# Altium PCB PCB1.PcbDoc
Units mm, origin at the board's own origin, x right, y up, seen from the top; angles counter-clockwise.
Board outline 104.78 x 92.08 mm, 2 copper layers (Top Layer, Bottom Layer); 18 components, 11 nets, 107 pads, 0 vias.
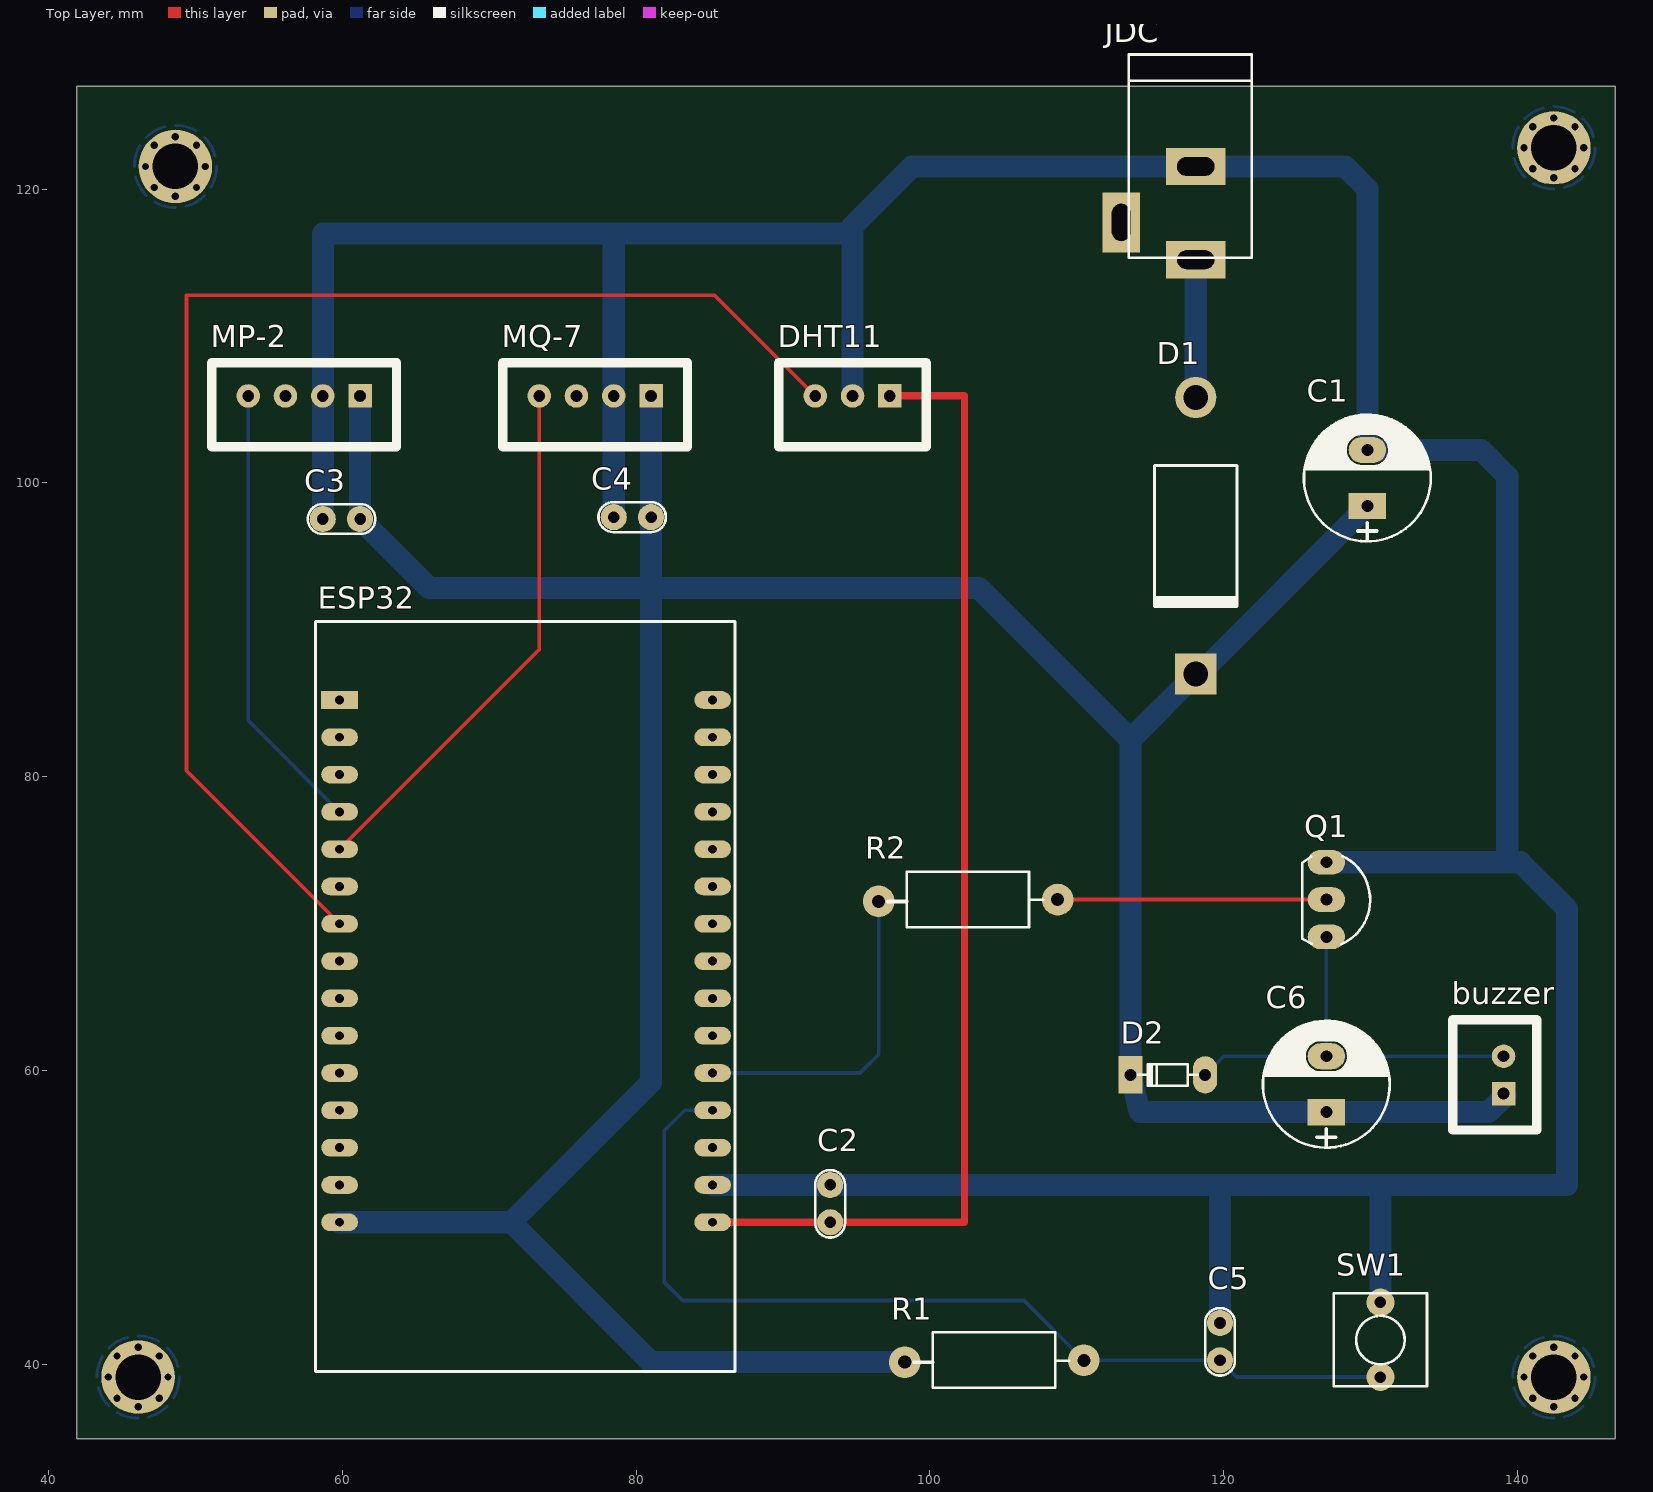
[diagram p0: Top Layer view]
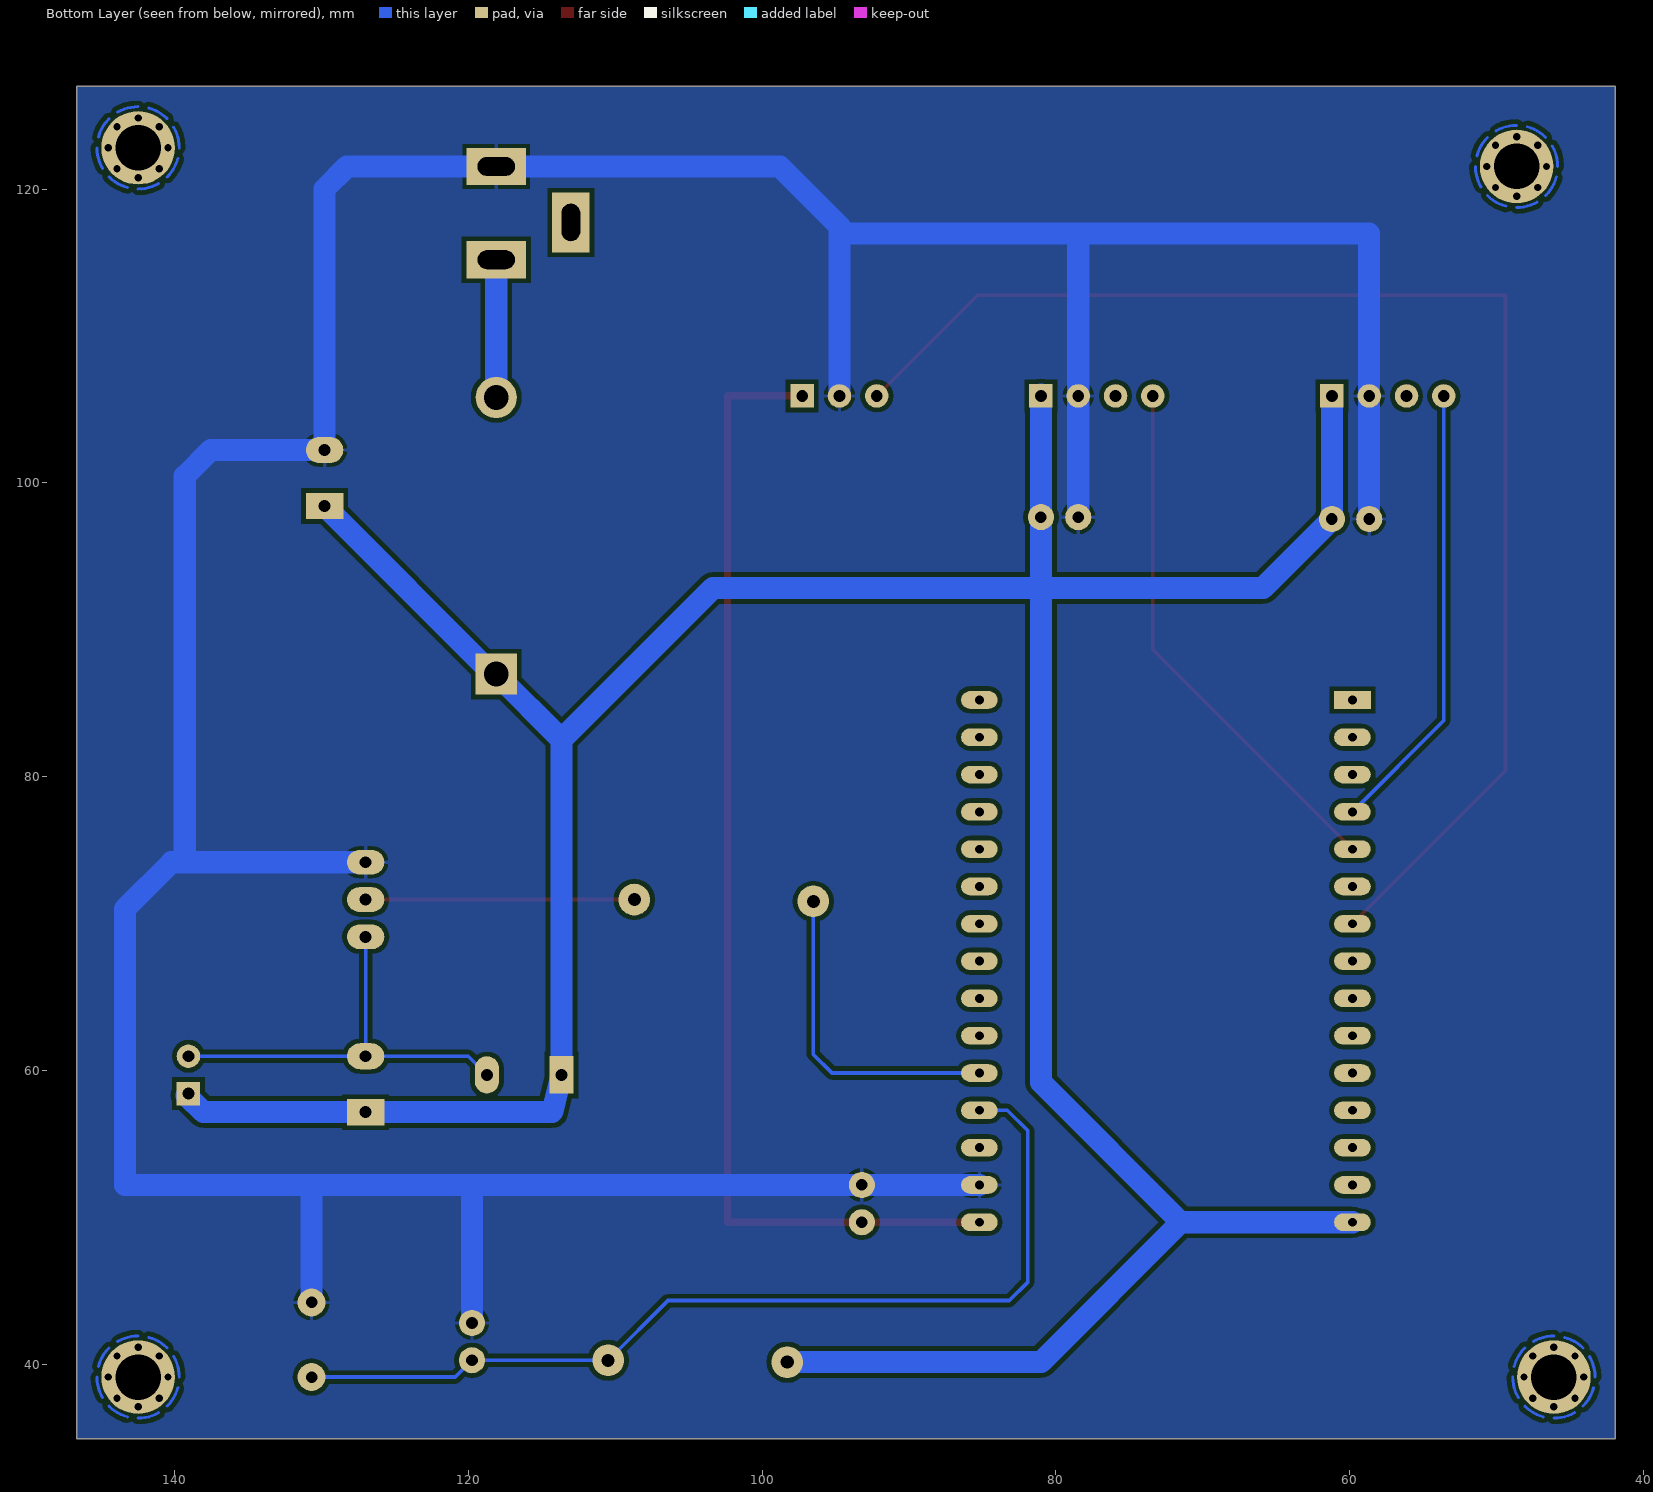
[diagram p1: Bottom Layer view, seen from below]
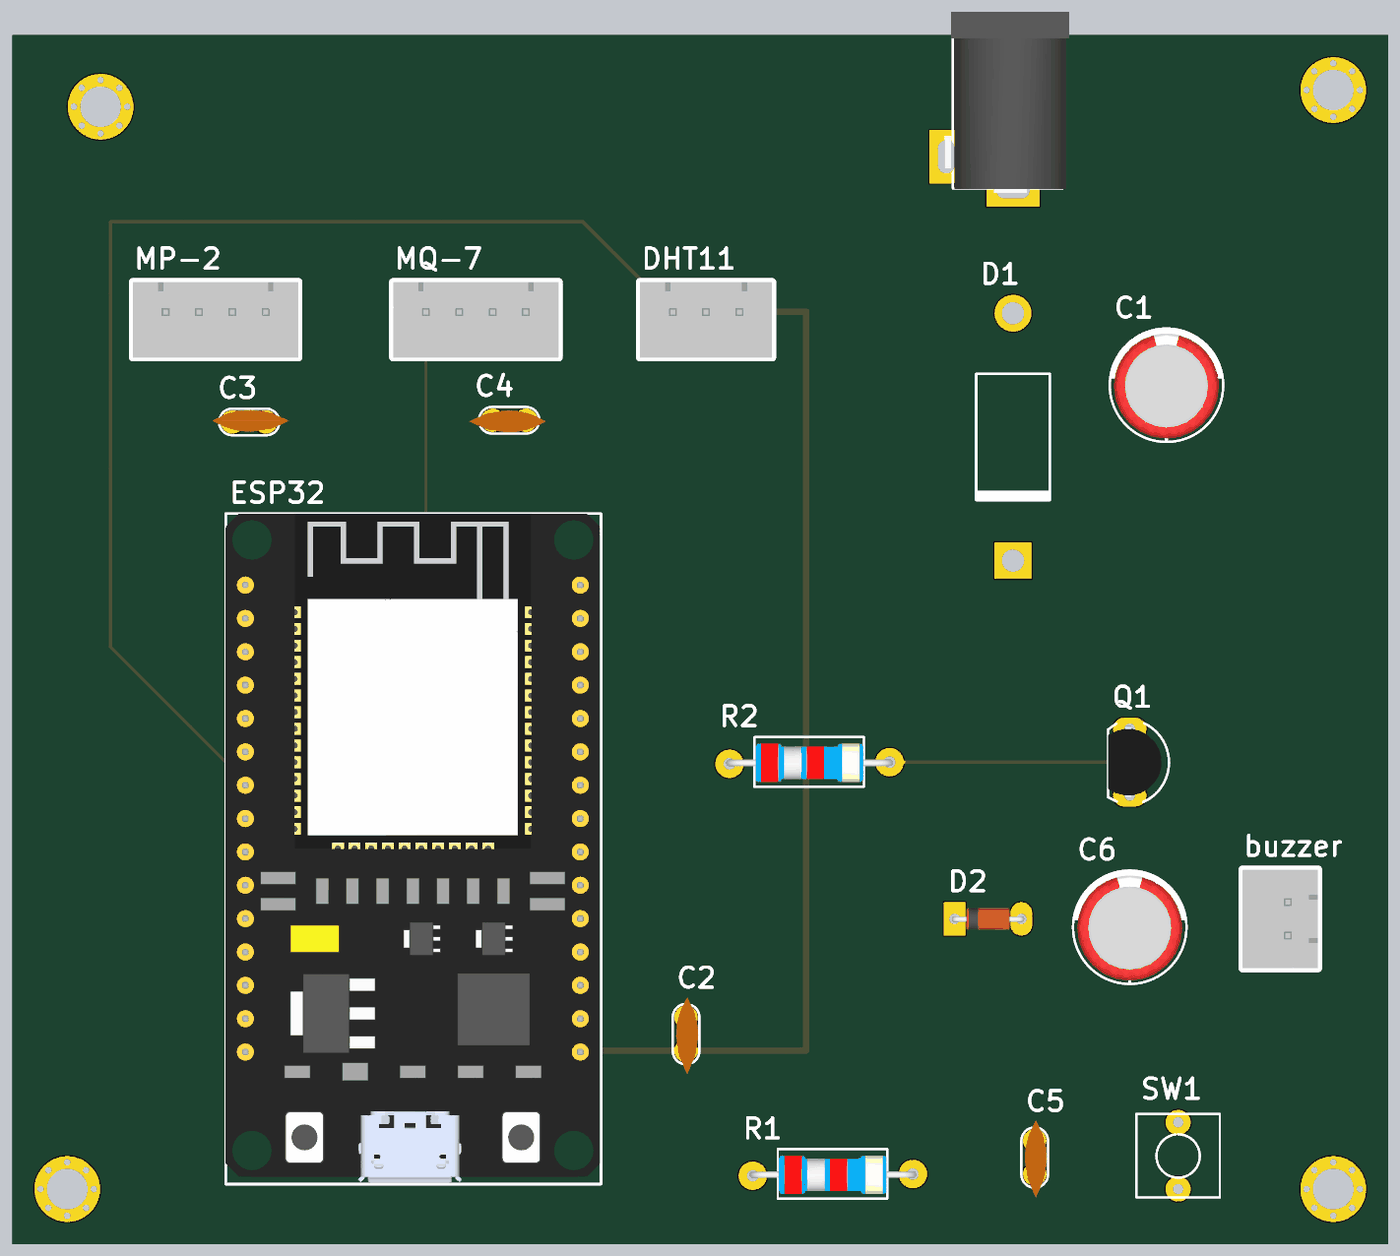
[diagram p2: 3D render of the assembled board from above, using the file's embedded part models]

## Layer stack, top to bottom
Top Solder: solder mask 0.0102, Solder Resist, Dk 3.5
Top Layer: signal copper 0.0356
Dielectric 1: dielectric 0.32, FR-4, Dk 4.8
Bottom Layer: signal copper 0.0356
Bottom Solder: solder mask 0.0102, Solder Resist, Dk 3.5

## Board outline
41.91,34.925 146.685,34.925 146.685,127 41.91,127

## Design rules (kind name [scope] priority, off if disabled: settings)
Clearance [All] p1: gap=0.31
PolygonConnect [All] p1: connectstyle=Relief reliefconductorwidth=0.254 reliefentries=4 polygonreliefangle="90 Angle" airgapwidth=0.254
RoutingLayers [All] p1: top layer_v5=FALSE bottom layer_v5=TRUE
RoutingVias [All] p1: holewidth=0.711 width=1.27 viastyle="Through Hole" minholewidth=0.711 minwidth=1.27 maxholewidth=0.711 maxwidth=1.27
SolderMaskExpansion [All] p1: expansion=0.102
Width 3V [InNet('3.3V')] p1: maxlimit=0.7 minlimit=0.3 preferedwidth=0.5
Width GND [InNet('GND')] p2: maxlimit=1.7 minlimit=1.3 preferedwidth=1.5
Width 5V [InNet('5V')] p3: maxlimit=1.7 minlimit=1.3 preferedwidth=1.5
Width [All] p4: maxlimit=0.254 minlimit=0.254 preferedwidth=0.254
29 further rules are at their usual default settings.

## Components (designator, comment, footprint, x,y, rotation, side; value= is the part's Value field where it differs from the comment)
buzzer "buzzer" XH2.54M-2 139.065,58.42 r90 top
C1 "1000uF/16V" CP1.5/3.4 129.794,98.425 r90 top
C2 "100pF" CN1 93.218,52.197 r270 top
C3 "100nF" CN1 58.674,97.536 r0 top
C4 "100nF" CN1 81.026,97.663 r180 top
C5 "100nF" CN1 119.761,42.799 r270 top
C6 "100uF/35V" CP1.5/3.4 127,57.15 r90 top
D1 "Diode 1N5408" DO-201AD 118.11,96.393 r270 top
D2 "100v" "DIODE 0.5A" 116.205,59.69 r0 top
DHT11 "DHT11" XH2.54M-3 97.282,105.918 r180 top
ESP32 "ESP32 DEVKIT" "ESP32 WROOM 32 KIT" 59.817,85.217 r0 top
JDC "Jac DC" DC-IN 115.57,118.364 r270 top
MP-2 "MP-2" XH2.54M-4 61.214,105.918 r180 top
MQ-7 "MQ-7" XH2.54M-4 81.026,105.918 r180 top
Q1 "2N222" TO92-123 127,71.628 r270 top
R1 "1K" RES-1/2W 103.886,40.259 r0 top
R2 "1K" RES-1/2W 102.108,71.628 r0 top
SW1 "SW" SW2 130.683,39.116 r90 top

## Footprints (in the part's own frame and the unit in brackets; to place one, negate y for a bottom-side part, rotate by r counter-clockwise, add the part's x,y. Pads: shape width x height; smd on the part's side, far side on the other; paste and mask are expansions set on the pad)
CN1 [mil]
  round 70 hole 31: 1(0,0) 2(100,0)
  silkscreen extent -40,-40 141,40, body extent -60,-30 170,37, height 265
CP1.5/3.4 [mil] "Tu hoa 220->470uF,16V, 470uF/16V,25V"
  rect 70x100 hole 32: 1(0,0)
  oval 70x100 hole 32: 2(150,0)
  silkscreen extent -95,-170 245,170, body extent -85,-157 230,157, height 446
DC-IN [mil] "Jac DC input"
  rect 100x160 hole 50 slot 100 at 90 deg: 1(125,100) 2(-125,100)
  rect 160x100 hole 50 slot 100 at 0 deg: 3(25,-100)
  silkscreen extent -425,-80 120,250, body extent -410,-105 134,269, height 434
"DIODE 0.5A" [mil] "Diode muoi, xung"
  oval 65x100 hole 32: 1(100,0)
  rect 65x100 hole 32: 2(-100,0)
  silkscreen extent -80,-30 80,28, body extent -108,-33 108,32, height 61
DO-201AD [mm] "Diode, Axial; Body 9.5 x 5.6 mm (LxDia. max), Lead Dia. 1.32 mm (max)"
  round 2.8 hole 1.7: 1(-9.42,0)
  rect 2.8x2.8 hole 1.7: 2(9.42,0)
  silkscreen extent -4.8,-2.8 4.9,2.8
"ESP32 WROOM 32 KIT" [mm]
  rect 2.5x1.2 hole 0.6: 1(0,0)
  oval 2.5x1.2 hole 0.6: 2(0,-2.54) 3(0,-5.08) 4(0,-7.62) 5(0,-10.16) 6(0,-12.7) 7(0,-15.24) 8(0,-17.78) 9(0,-20.32) 10(0,-22.86) 11(0,-25.4) 12(0,-27.94) 13(0,-30.48) 14(0,-33.02) 15(0,-35.56) 16(25.4,-35.56) 17(25.4,-33.02) 18(25.4,-30.48) 19(25.4,-27.94) 20(25.4,-25.4) 21(25.4,-22.86) 22(25.4,-20.32) 23(25.4,-17.78) 24(25.4,-15.24) 25(25.4,-12.7) 26(25.4,-10.16) 27(25.4,-7.62) 28(25.4,-5.08) 29(25.4,-2.54) 30(25.4,0)
  silkscreen extent -1.65,-45.72 26.92,5.33, body extent -1.65,-45.6 26.85,5.33, height 10.49
RES-1/2W [mil]
  round 85 hole 35: 1(-220,-5) 2(260,0)
  silkscreen extent -195,-74 221,75, body extent -230,-60 270,56, height 121
SW2 [mil] "SW button 2pin, 250x 250 mil"
  round 75 hole 31: 1(0,0) 2(200,0)
  silkscreen extent -25,-125 225,125
TO92-123 [mil] "TO-92"
  oval 66x100 hole 32: 1(-100,0) 2(0,0) 3(100,0)
  silkscreen extent -117,-65 120,118, body extent -109,-66 109,95, height 245
XH2.54M-2 [mm]
  rect 1.6x1.6 hole 0.8: 1(0,0)
  round 1.6 hole 0.8: 2(2.54,0)
  silkscreen extent -2.48,-2.26 5.02,3.46, body extent -2.48,-2.26 5.02,3.48, height 6.91
XH2.54M-3 [mm]
  rect 1.6x1.6 hole 0.8: 1(0,0)
  round 1.6 hole 0.8: 2(2.54,0) 3(5.08,0)
  silkscreen extent -2.48,-2.26 7.56,3.46, body extent -2.48,-2.26 7.56,3.48, height 6.91
XH2.54M-4 [mm]
  rect 1.6x1.6 hole 0.8: 1(0,0)
  round 1.6 hole 0.8: 2(2.54,0) 3(5.08,0) 4(7.62,0)
  silkscreen extent -2.48,-2.26 10.1,3.46, body extent -2.48,-2.26 10.1,3.48, height 6.91

## Part data
buzzer: library part "Header 2P 2.54 Duc Thang", "C?m"
C1: library part CP4, "Cap 1000uF/16V - 220uF/50V"
C2 C3 C4 C5: library part CN1, "Cap np  1pF - 472pF"
C6: library part CP3, "Cap 100uF/35V - 470uF/16V"
D1: "3 Amp Medium Power Silicon Rectifier Diode"
D2: library part "Diode 1N4148", "C?m"
DHT11: library part "Header 3P 2.54 Duc Thang", "C?m"
ESP32: library part "ESP32 WROOM 32 KIT"
JDC: library part DCIN, "Jac DC input"
MP-2 MQ-7: library part "Header 4P 2.54 Duc Thang", "C?m"
Q1: "NPN 600mW, ECB"
R1 R2: library part Res, "Res"
SW1: library part SW2, "Switch button 2 pin"

## Free pads (board coordinates)
  round 0.5 hole 0.5: 2(46.101,41.148) 2(48.641,123.571) 2(142.494,41.148) 2(142.494,124.841) 3(44.664,40.553) 3(47.204,122.976) 3(141.057,40.553) 3(141.057,124.246) 4(44.069,39.116) 4(46.609,121.539) 4(140.462,39.116) 4(140.462,122.809) 5(44.664,37.679) 5(47.204,120.102) 5(141.057,37.679) 5(141.057,121.372) 6(46.101,37.084) 6(48.641,119.507) 6(142.494,37.084) 6(142.494,120.777) 7(47.538,37.679) 7(50.078,120.102) 7(143.931,37.679) 7(143.931,121.372) 8(48.133,39.116) 8(50.673,121.539) 8(144.526,39.116) 8(144.526,122.809) 9(47.538,40.553) 9(50.078,122.976) 9(143.931,40.553) 9(143.931,124.246)
  round 5 hole 3.1: 3(46.101,39.116) 3(48.641,121.539) 3(142.494,39.116) 3(142.494,122.809)

## Nets (pads, with @x,y where several pads share a name; then routed paths per layer and width w, separated by ;. In a path a pad name is that pad's centre, name@x,y a point inside that pad or via, vN(x,y) a via of type N, cw(c..) or ccw(c..) an arc to the next point about the centre after c; other vN are vias at no path point)
3.3V: C2.2 DHT11.1 ESP32.16 | length 79.4
  Top Layer w0.5: ESP32.16 C2.2 ; C2.2@92.329,49.657 C2.2 ; DHT11.1 102.362,105.918 102.362,49.657 C2.2
5V: buzzer.1 C1.1 C3.2 C4.1 C6.1 D1.2 D2.2 ESP32.15 MP-2.1 MQ-7.1 R1.1 | length 243.3
  Bottom Layer w1.5: ESP32.15 71.501,49.657 ; MP-2.1 C3.2 65.913,92.837 81.026,92.837 ; MQ-7.1@81.026,106.008 MQ-7.1 C4.1 81.026,92.837 ; R1.1 81.026,40.132 71.501,49.657 ; C1.1 118.342,86.973 D1.2 113.665,82.528 ; buzzer.1@139.192,58.293 138.049,57.15 C6.1 114.3,57.15 D2.2 113.665,82.528 ; 71.501,49.657 81.026,59.182 81.026,92.837 ; 81.026,92.837 103.356,92.837 113.665,82.528
BUZZER: ESP32.20 R2.1 | length 22.2
  Bottom Layer w0.254: ESP32.20 95.25,59.817 96.52,61.087 R2.1
DHT11: DHT11.3 ESP32.7 | length 92.8
  Top Layer w0.254: ESP32.7 49.403,80.391 49.403,112.776 85.344,112.776 DHT11.3
GND: C1.2 C2.1 C3.1 C4.2 C5.1 DHT11.2 ESP32.17 JDC.2 MP-2.2 MQ-7.2 Q1.1 SW1.2 | length 288.7
  Bottom Layer w1.5: C3.1 MP-2.2 58.674,116.967 78.486,116.967 ; C4.2 MQ-7.2 78.486,116.967 ; ESP32.17 C2.1 119.761,52.197 ; 94.234,116.967 78.486,116.967 ; DHT11.2 94.742,117.475 98.806,121.539 JDC.2 128.27,121.539 129.794,120.015 C1.2 137.541,102.235 139.319,100.457 139.319,75.057 ; C5.1 119.761,52.197 ; Q1.1 140.208,74.168 143.383,70.993 143.383,52.197 130.683,52.197 ; SW1.2 130.683,52.197 ; 119.761,52.197 130.683,52.197
MP-2: ESP32.4 MP-2.4 | length 30.9
  Bottom Layer w0.254: MP-2.4 53.594,83.82 ESP32.4
MQ-7: ESP32.5 MQ-7.4 | length 36.5
  Top Layer w0.254: ESP32.5 73.406,88.646 MQ-7.4
Netbuzzer_2: buzzer.2 C6.2 D2.1 Q1.3 | length 29
  Bottom Layer w0.254: D2.1 120.015,60.96 C6.2 ; Q1.3 C6.2 ; buzzer.2 C6.2
NetD1_1: D1.1 JDC.1 | length 9.4
  Bottom Layer w1.5: D1.1 JDC.1
NetQ1_2: Q1.2 R2.2 | length 18.3
  Top Layer w0.254: R2.2 Q1.2
SW: C5.2 ESP32.19 R1.2 SW1.1 | length 65.6
  Bottom Layer w0.254: ESP32.19 83.312,57.277 81.915,55.88 81.915,45.593 83.185,44.323 106.426,44.323 R1.2 C5.2 120.904,39.116 SW1.1
pads on no net: ESP32.1 ESP32.2 ESP32.3 ESP32.6 ESP32.8 ESP32.9 ESP32.10 ESP32.11 ESP32.12 ESP32.13 ESP32.14 ESP32.18 ESP32.21 ESP32.22 ESP32.23 ESP32.24 ESP32.25 ESP32.26 ESP32.27 ESP32.28 ESP32.29 ESP32.30 JDC.3 MP-2.3 MQ-7.3
copper on no net: | length 46.9
  Bottom Layer w0.2: 43.301,39.116 cw(c46.101,39.116) 43.676,40.516 ; 43.396,38.391 ccw(c46.101,39.116) 44.121,37.136 ; 44.121,41.096 cw(c46.101,39.116) 45.376,41.821 ; 44.701,36.691 ccw(c46.101,39.116) 46.101,36.316 ; 45.841,121.539 cw(c48.641,121.539) 46.216,122.939 ; 45.936,120.814 ccw(c48.641,121.539) 46.661,119.559 ; 46.101,41.916 cw(c46.101,39.116) 47.501,41.541 ; 46.661,123.519 cw(c48.641,121.539) 47.916,124.244 ; 46.826,36.411 ccw(c46.101,39.116) 48.081,37.136 ; 47.241,119.114 ccw(c48.641,121.539) 48.641,118.739 ; 48.081,41.096 cw(c46.101,39.116) 48.806,39.841 ; 48.526,37.716 ccw(c46.101,39.116) 48.901,39.116 ; 48.641,124.339 cw(c48.641,121.539) 50.041,123.964 ; 49.366,118.834 ccw(c48.641,121.539) 50.621,119.559 ; 50.621,123.519 cw(c48.641,121.539) 51.346,122.264 ; 51.066,120.139 ccw(c48.641,121.539) 51.441,121.539 ; 139.694,39.116 cw(c142.494,39.116) 140.069,40.516 ; 139.694,122.809 cw(c142.494,122.809) 140.069,124.209 ; 139.789,38.391 ccw(c142.494,39.116) 140.514,37.136 ; 139.789,122.084 ccw(c142.494,122.809) 140.514,120.829 ; 140.514,41.096 cw(c142.494,39.116) 141.769,41.821 ; 140.514,124.789 cw(c142.494,122.809) 141.769,125.514 ; 141.094,36.691 ccw(c142.494,39.116) 142.494,36.316 ; 141.094,120.384 ccw(c142.494,122.809) 142.494,120.009 ; 142.494,41.916 cw(c142.494,39.116) 143.894,41.541 ; 142.494,125.609 cw(c142.494,122.809) 143.894,125.234 ; 143.219,36.411 ccw(c142.494,39.116) 144.474,37.136 ; 143.219,120.104 ccw(c142.494,122.809) 144.474,120.829 ; 144.474,41.096 cw(c142.494,39.116) 145.199,39.841 ; 144.474,124.789 cw(c142.494,122.809) 145.199,123.534 ; 144.919,37.716 ccw(c142.494,39.116) 145.294,39.116 ; 144.919,121.409 ccw(c142.494,122.809) 145.294,122.809

## Polygon pours and split planes (outlines as drawn)
GND on Bottom Layer "bottom Layer-No Net" (solid, remove dead copper, pour order 0): 42.037,127 41.91,126.873 41.91,34.925 146.685,34.925 146.685,127